# Altium PCB PCB1.PcbDoc
Units mil, origin at the board's own origin, x right, y up, seen from the top; angles counter-clockwise.
Board outline 590.55 x 1023.62 mil, 2 copper layers (Top Layer, Bottom Layer); 9 components, 6 nets, 20 pads, 0 vias.
Unrouted connection lines stored in the file: 4.
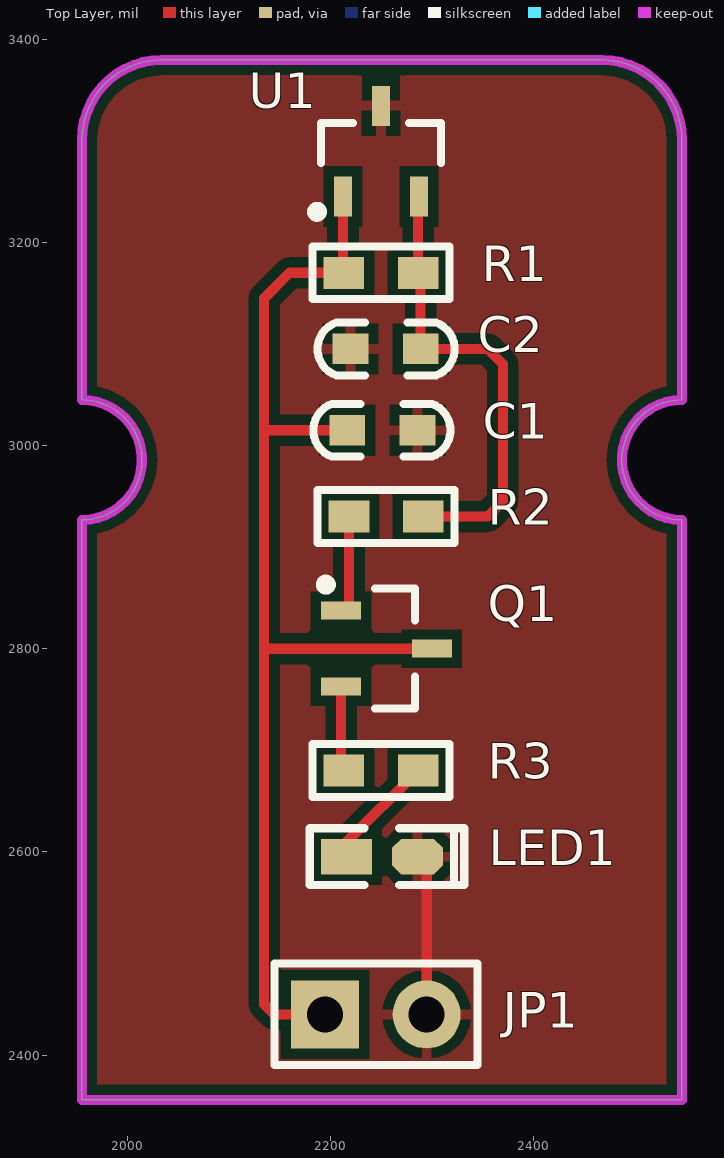
[diagram p0: Top Layer view]
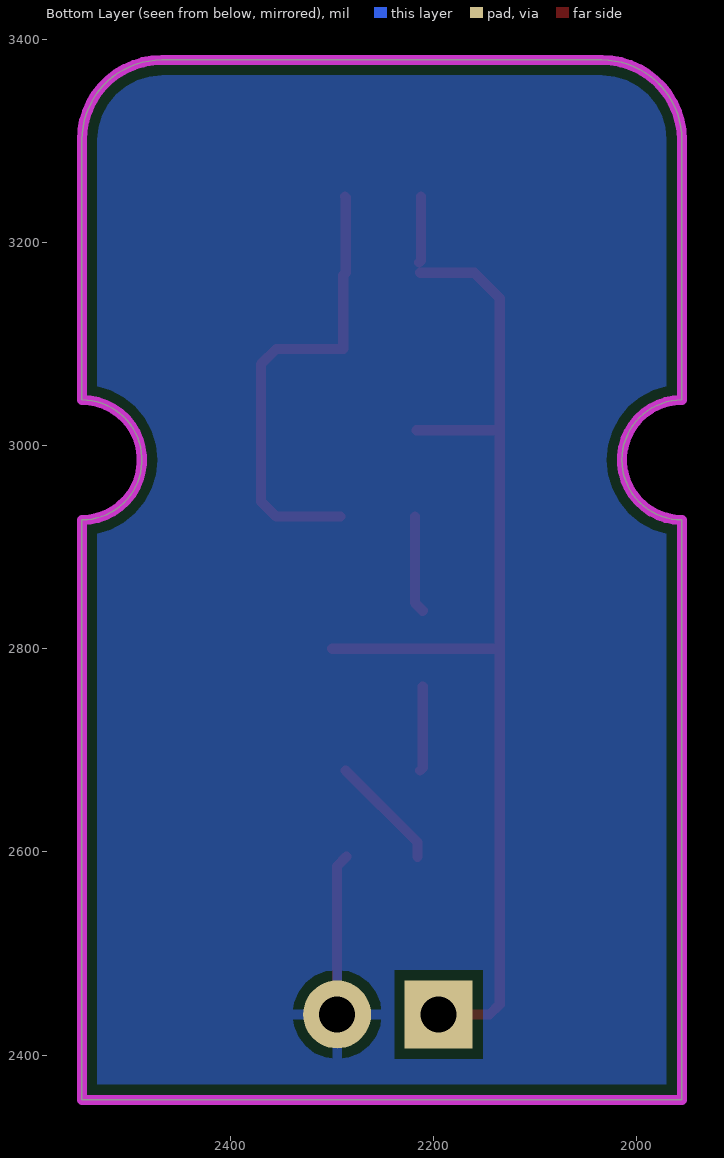
[diagram p1: Bottom Layer view, seen from below]

## Layer stack, top to bottom
Top Solder: solder mask 0.4, Solder Resist, Dk 3.5
Top Layer: signal copper 1.4
Dielectric 1: dielectric 12.6, FR-4, Dk 4.8
Bottom Layer: signal copper 1.4
Bottom Solder: solder mask 0.4, Solder Resist, Dk 3.5

## Board outline
1955.62,2355.86 1955.62,2926.73 ccw(c1955.62,2985.78) 1955.62,3044.84 1955.62,3300.75 cw(c2034.36,3300.75) 2034.36,3379.49 2467.43,3379.49 cw(c2467.43,3300.75) 2546.17,3300.75 2546.17,3044.84 ccw(c2546.17,2985.78) 2546.17,2926.73 2546.17,2355.86

## Design rules (kind name [scope] priority, off if disabled: settings)
Clearance [All] p1: gap=10 ignorepadtopadclearanceinfootprint=FALSE except(0: Arc-Hole Track-Hole SMDPad-Hole THPad-Hole Via-Hole Fill-Hole Poly-Hole Region-Hole Text-Hole)
PolygonConnect [All] p1: connectstyle=Relief reliefconductorwidth=10 reliefentries=4 polygonreliefangle="90 Angle" airgapwidth=10
RoutingVias [All] p1: holewidth=28 width=50 viastyle="Through Hole" minholewidth=28 minwidth=50 maxholewidth=28 maxwidth=50
SilkToSolderMaskClearance [IsPad] p1: minsilkscreentomaskgap=3 clearancetoexposedcopper=TRUE
SolderMaskExpansion [All] p1: expansion=4
Width [All] p1: maxlimit=10 minlimit=10 preferedwidth=10
29 further rules are at their usual default settings.

## Components (designator, comment, footprint, x,y, rotation, side; value= is the part's Value field where it differs from the comment)
C1 "10nF" "C 0603" 2250.9,3015 r180 top
C2 "100pF" "C 0603" 2255,3095 r0 top
JP1 "HDR-1X2" HDR-1X2 2195,2440 r0 top
LED1 "LED_RED" "LED 0603B" 2250.9,2595 r0 top
Q1 "S8050" SOT23-3L 2255.71,2800 r270 top
R1 "10K" "R 0603" 2250,3170 r180 top
R2 "1K" "R 0603" 2255,2930 r180 top
R3 "1K" "R 0603" 2250,2680 r180 top
U1 "MH253ESO" MH253ESO 2250,3290 r0 top locked

## Footprints (in the part's own frame and the unit in brackets; to place one, negate y for a bottom-side part, rotate by r counter-clockwise, add the part's x,y. Pads: shape width x height; smd on the part's side, far side on the other; paste and mask are expansions set on the pad)
"C 0603" [mil] "无极性贴片电容"
  rect 35x30 smd: 1(-35,0) 2(34,0)
  silkscreen extent -67,-26 67,26, body extent -31,-16 31,16, height 32
HDR-1X2 [mm] "排针，2脚"
  rect 1.7x1.7 hole 0.9: 1(0,0)
  round 1.7 hole 0.9: 2(2.54,0)
  silkscreen extent -1.27,-1.27 3.81,1.27, body extent -1.27,-1.27 3.81,1.27, height 8.5
"LED 0603B" [mil] "蓝色0603LED                             淘宝ID:黄晶宝石"
  rect 50x35 smd: 1(-35,0.26)
  oct 50x35 smd: 2(35,0.26)
  silkscreen extent -71,-28 81,28, body extent -31,-16 32,16, height 24
MH253ESO [mm] "3x1.3x1mm(长宽高)"
  rect 0.45x1 smd: 1(-0.95,-1.143) 2(0.95,-1.143) 3(0,1.125)
  silkscreen extent -1.72,-1.65 1.5,0.7, body extent -1.5,-1.2 1.5,1.2, height 1.05
"R 0603" [mil] "1/10W贴片电阻"
  rect 40x31.5 smd: 1(-36.5,0) 2(36.5,0)
  silkscreen extent -68,-26 68,26, body extent -31,-16 32,16, height 16
SOT23-3L [mm] "3x1.3x1mm(长宽高)"
  rect 0.45x1 smd: 1(-0.95,-1.143) 2(0.95,-1.143) 3(0,1.125)
  silkscreen extent -1.72,-1.65 1.5,0.7, body extent -1.5,-1.2 1.5,1.2, height 1.05

## Part data
C1 C2: library part C, "无极性贴片电容", BOM名称=无极性, 学习资源=www.ooocke.
JP1: library part "Header 2", "2P接插件", BOM名称=2P接, 学习资源=www.ooocke.
Q1: library part NPN
R1 R2 R3: library part R, "贴片电阻", BOM名称=ÌùÆ, 学习资源=www.ooocke.
U1: "全极霍尔效应开关"

## Nets (pads, with @x,y where several pads share a name; then routed paths per layer and width w, separated by ;. In a path a pad name is that pad's centre, name@x,y a point inside that pad or via, vN(x,y) a via of type N, cw(c..) or ccw(c..) an arc to the next point about the centre after c; other vN are vias at no path point)
3.3V: C1.2 JP1.1 Q1.3 R1.2 U1.1 | length 1155.6
  Top Layer w10: 2140,2800 Q1.3 ; JP1.1 2145,2440 2135,2450 2135,3015 ; U1.1 2212.6,3181.8 R1.2@2214.4,3180 ; R1.2 2160,3170 2135,3145 2135,3015 ; C1.2 2135,3015
GND: C1.1 C2.1 JP1.2 LED1.2 U1.3 | length 159
  Top Layer w10: LED1.2 2295,2586.16 JP1.2
NetLED1_1: LED1.1 R3.1 | length 114
  Top Layer w10: LED1.1 2215.9,2609.4 R3.1
NetQ1_1: Q1.1 R2.2 | length 95.8
  Top Layer w10: Q1.1 2218.5,2845.19 R2.2
NetQ1_2: Q1.2 R3.2 | length 83.8
  Top Layer w10: Q1.2 2210.71,2682.79 R3.2
OUT: C2.2 R1.1 R2.1 U1.2 | length 458.3
  Top Layer w10: U1.2 2286.5,3244.1 R1.1 2289,3167.5 C2.2 2355,3095 2370,3080 2370,2945 2355,2930 R2.1

## Polygon pours and split planes (outlines as drawn)
GND on Top Layer "Top Layer-No Net" (solid, remove dead copper, pour order 0): 1955.62,2355.86 1955.62,2926.73 ccw(c1955.62,2985.78) 1955.62,3044.84 1955.62,3300.75 cw(c2034.36,3300.75) 2034.36,3379.49 2467.43,3379.49 cw(c2467.43,3300.75) 2546.17,3300.75 2546.17,3044.84 ccw(c2546.17,2985.78) 2546.17,2926.73 2546.17,2355.86
GND on Bottom Layer "Top Layer-No Net1" (solid, remove dead copper, pour order 1): 1955.62,2355.86 1955.62,2926.73 ccw(c1955.62,2985.78) 1955.62,3044.84 1955.62,3300.75 cw(c2034.36,3300.75) 2034.36,3379.49 2467.43,3379.49 cw(c2467.43,3300.75) 2546.17,3300.75 2546.17,3044.84 ccw(c2546.17,2985.78) 2546.17,2926.73 2546.17,2355.86

## Keep-outs
Keep-Out Layer:
  lines w10: 1955.62,2355.86 2546.17,2355.86 2546.17,2926.73 cw(c2546.17,2985.78) 2546.17,3044.84 2546.17,3300.75 ccw(c2467.43,3300.75) 2467.43,3379.49 2339.48,3379.49 2162.32,3379.49 2034.36,3379.49 ccw(c2034.36,3300.75) 1955.62,3300.75 1955.62,3044.84 cw(c1955.62,2985.78) 1955.62,2926.73 1955.62,2355.86